# Altium PCB PCB1.PcbDoc
Units mil, origin at the board's own origin, x right, y up, seen from the top; angles counter-clockwise.
Board outline 2598.43 x 2755.91 mil, 2 copper layers (Top Layer, Bottom Layer); 54 components, 38 nets, 238 pads, 44 vias.
Unrouted connection lines stored in the file: 1.
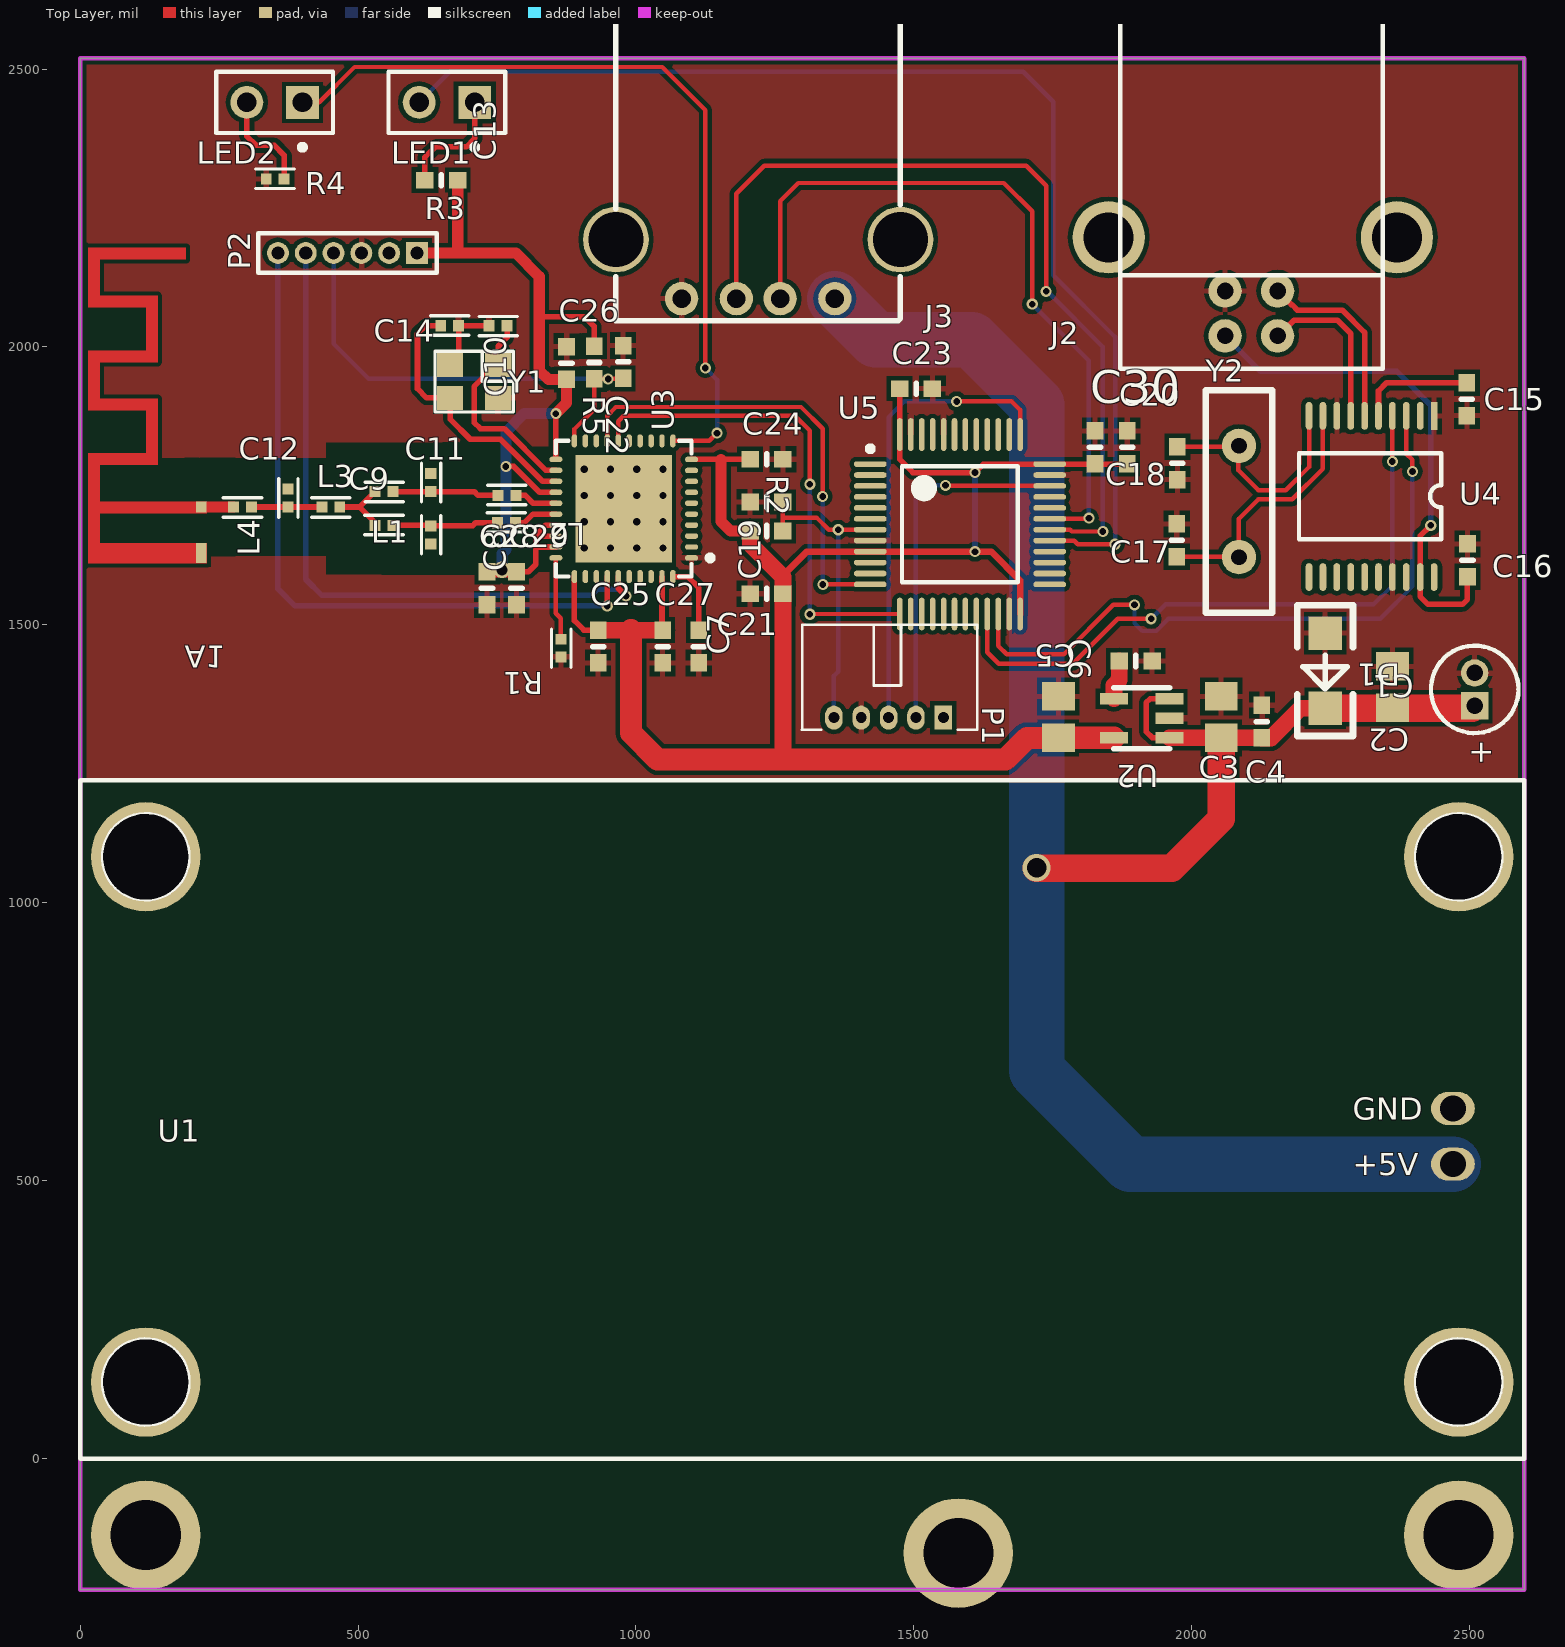
[diagram p0: Top Layer view]
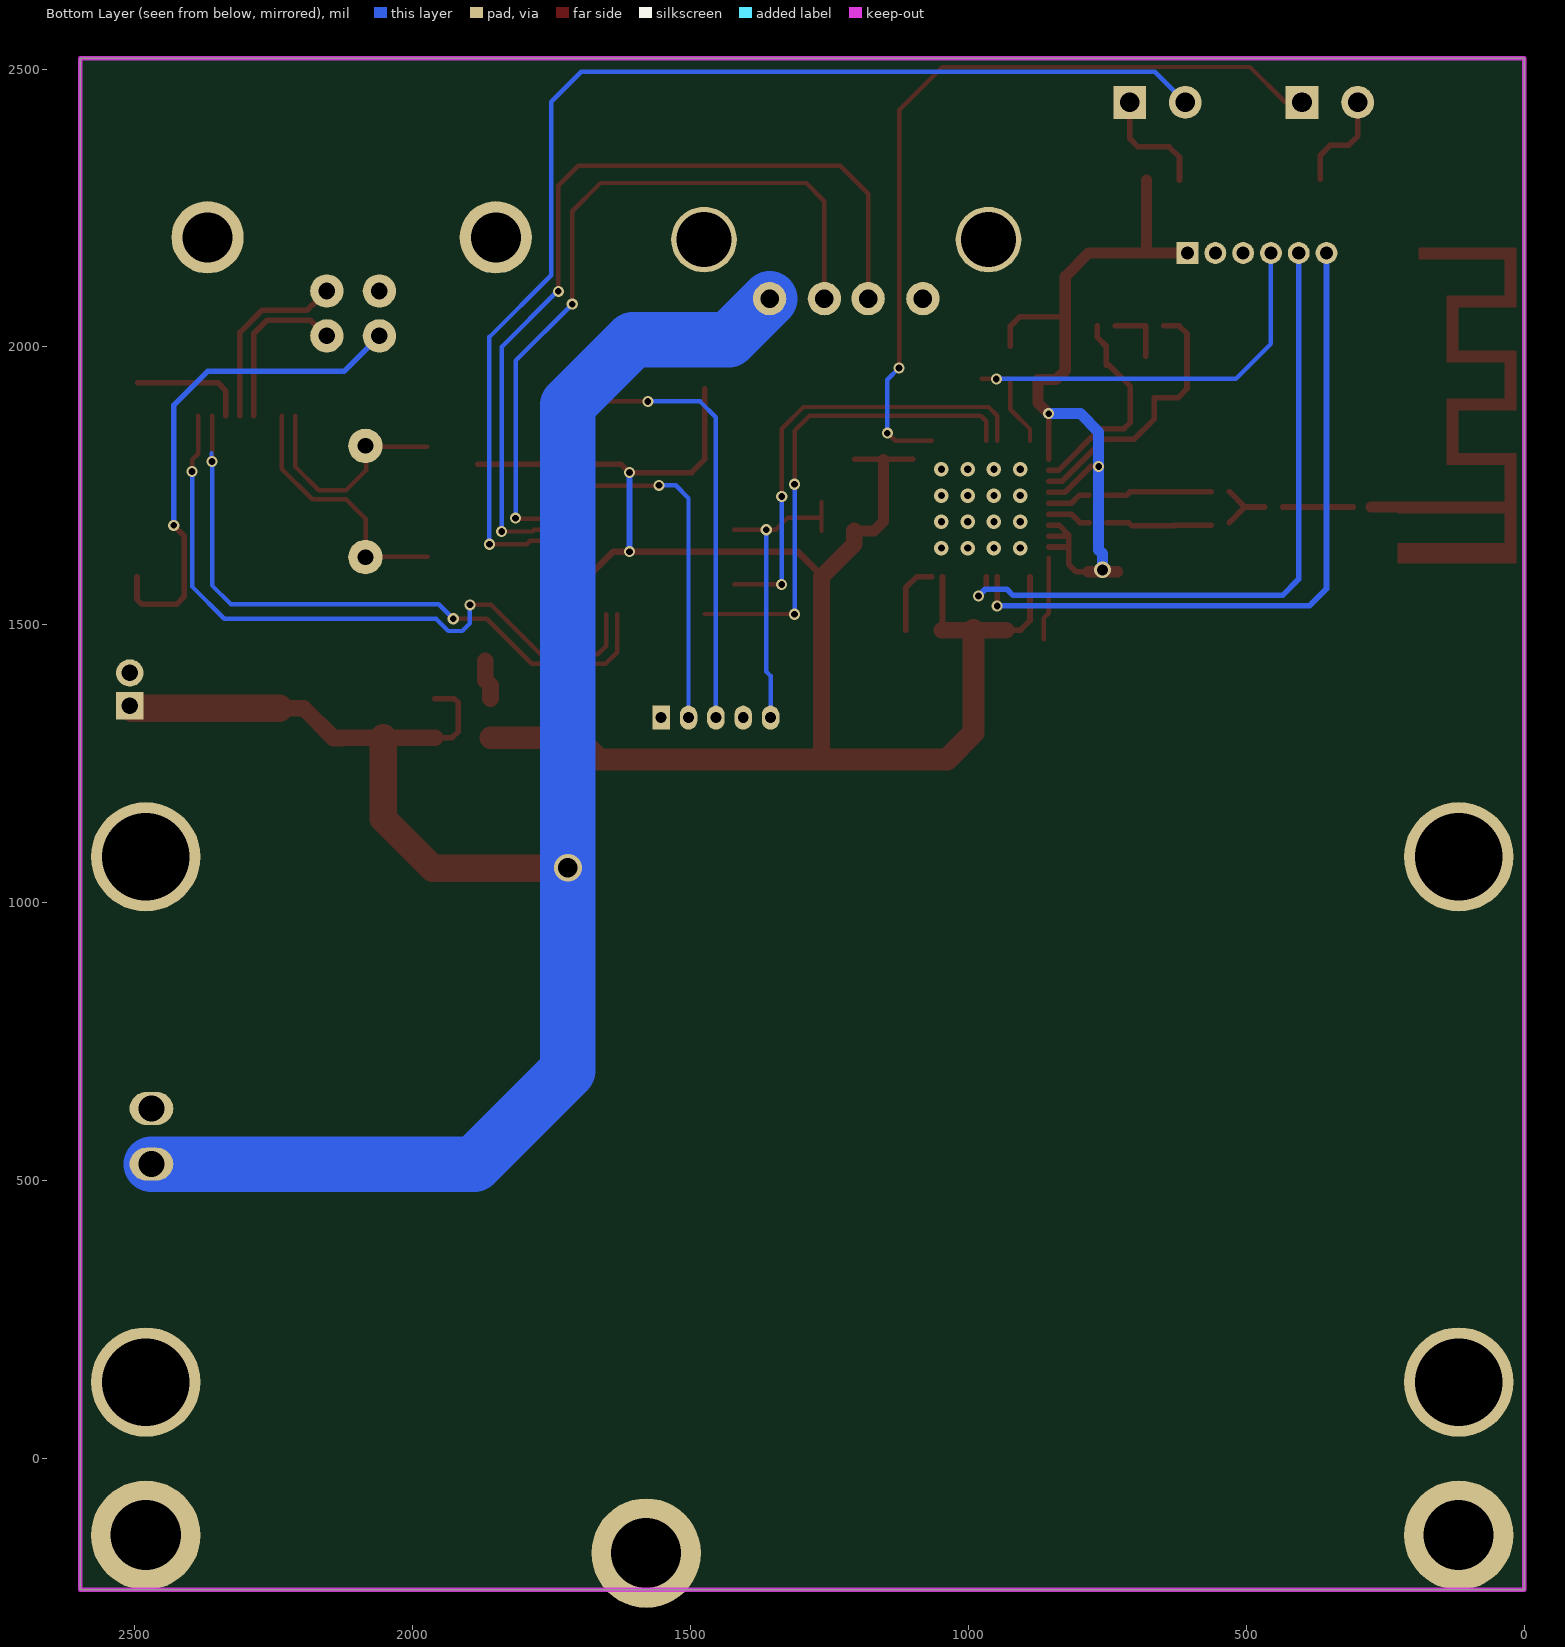
[diagram p1: Bottom Layer view, seen from below]

## Layer stack, top to bottom
Top Layer: signal copper 1.4
Dielectric: dielectric 12.6, FR-4, Dk 4.8
Bottom Layer: signal copper 1.4

## Board outline
0,-236.22 2598.43,-236.22 2598.43,2519.69 0,2519.69

## Design rules (kind name [scope] priority, off if disabled: settings)
Clearance rf [InNetClass('rf')] p1: gap=78.74
Clearance [All] p2: gap=8
FabricationTestPointUsage TestPointUsage [All] p1: valid=0 allowmultiple=FALSE
FabricationTestpoint Testpoint [All] p1: side=3 testpointundercomponent=TRUE minsize=40 maxsize=100 preferedsize=60 minholesize=0 maxholesize=40 preferedholesize=32 testpointgrid=1 allowsidetop=TRUE allowsidebottom=TRUE usegrid=TRUE gridtolerance=0.01
HoleSize [All] p1: absolutevalues=TRUE maxlimit=196.85 minlimit=11.81 maxpercent=80.000 minpercent=20.000
PolygonConnect [All] p1: connectstyle=Relief reliefconductorwidth=10 reliefentries=4 polygonreliefangle="90 Angle"
RoutingVias [All] p1: holewidth=28 width=50 viastyle="Through Hole" minholewidth=28 minwidth=50 maxholewidth=28 maxwidth=50
SilkscreenOverComponentPads [All] p1: minsilkscreentomaskgap=10
SolderMaskExpansion [All] p1: expansion=4
Width [All] p1: maxlimit=100 minlimit=8 preferedwidth=10
24 further rules are at their usual default settings.

## Classes and differential pairs
net class rf: NetA1_1 NetC8_1 NetC8_2 NetC9_1 NetC10_1 NetC10_2 NetC12_2

## Components (designator, comment, footprint, x,y, rotation, side; value= is the part's Value field where it differs from the comment)
A1 "Antenna" ANT-PCB-2.4G-IFA-AN043-TI-ORIGIN 218,1712 r270 top
C1 "47uF/35V" A 2509,1384 r90 top
C2 "1uF/50V" 0805 2361,1388 r90 top
C3 "10uF" 0805 2053,1334 r90 top
C4 "0.1uF" 0603 2126,1326 r90 top
C5 "10uF" 0805 1760,1334 r90 top
C6 "0.1uF" 0603 1899,1435 r0 top
C7 "1uF" 0603 1113,1461 r90 top
C8 "18pF" 0402_SMALL 756.13,1671.85 r0 top
C9 "1pF" 0402_SMALL 536,1666.85 r0 top
C10 "18pF" 0402_SMALL 757,1720.85 r0 top
C11 "1pF" 0402_SMALL 619,1767 r270 top
C12 "1pF" 0402_SMALL 362,1739 r270 top
C13 "12pF" 0402_SMALL 763,2050 r180 top
C14 "12pF" 0402_SMALL 654,2026 r0 top
C15 "0.1uF" 0603 2495,1906 r90 top
C16 "0.1uF" 0603 2496,1616 r90 top
C17 "22pF" 0603 1973,1652 r270 top
C18 "22pF" 0603 1974,1791 r90 top
C19 "0.1uF" 0603 1235,1721 r180 top
C20 "0.1uF" 0603 1884,1819.46 r270 top
C21 "0.1uF" 0603 1235,1556 r0 top
C22 "0.1uF" 0603 977,1973 r90 top
C23 "0.1uF" 0603 1504,1925 r180 top
C24 "1uF" 0603 1235,1798 r180 top
C25 "0.1uF" 0603 932,1461 r90 top
C26 "0.1uF" 0603 875,1971 r270 top
C27 "0.1uF" 0603 1048,1461 r90 top
C28 "0.1uF" 0603 732,1566 r90 top
C29 "0.1uF" 0603 785,1566 r90 top
C30 "1uF" 0603 1826,1819.46 r270 top
D1 "SMBJ7.0A" SMD4148 2240,1485 r270 top
J2 "USB-TYPE-B" USB_TYPEB 2060,2020 r90 top locked
J3 "检测板接口" USBA 1220,2140 r180 top locked
L1 "2nH" 0402_SMALL 558,1751.85 r180 top
L2 "2nH" 0402_SMALL 619,1673 r270 top
L3 "1nH" 0402_SMALL 462,1724 r180 top
L4 "3nH" 0402_SMALL 303,1724 r180 top
LED1 "红色led" PIN2 710,2440 r180 top
LED2 "蓝色" PIN2 400,2440 r180 top
P1 "Header 5" 5X1.25MMWS 1553,1333 r180 top
P2 "CC-debuger" MHDR1X6 606,2169 r180 top
R1 "56K/1%" 0402_SMALL 853,1469 r270 top
R2 "10K" 0603 1235,1669 r0 top
R3 "1K" 0603 650,2300 r180 top
R4 "1K" 0402_SMALL 340,2290 r0 top
R5 "10K" 0603 925,1972 r270 top
U1 "5V2A" ACDV5V 0,0 r0 top locked
U2 "RT9167A-33PB" SOT-23-5 1960,1297 r180 top
U3 "CC2541" QFN50P600X600X80-40N 978,1709 r180 top
U4 "CH345T" SSOP20 2436,1876 r180 top
U5 "STM32F103C8T6" LQFP48 1583,1681 r0 top
Y1 "8M" XTAL4TN_3225 709,1938 r180 top
Y2 "12M" XTAL1 2085,1622 r90 top

## Footprints (in the part's own frame and the unit in brackets; to place one, negate y for a bottom-side part, rotate by r counter-clockwise, add the part's x,y. Pads: shape width x height; smd on the part's side, far side on the other; paste and mask are expansions set on the pad)
5X1.25MMWS [mm]
  rect 0.8x1.1 hole 0.5: 1(0,0)
  oval 0.8x1.1 hole 0.5: 2(1.25,0) 3(2.5,0) 4(3.75,0) 5(5,0)
  silkscreen extent -1.55,-4.25 6.46,0.55
0402_SMALL [mm]
  rect 0.5x0.51 smd: 1(-0.13,0.305) 2(0.689,0.305)
  silkscreen extent -0.6,-0.12 1.15,0.77
0603 [mm]
  rect 0.8x0.762 smd: 1(0.75,0) 2(-0.75,0)
  silkscreen extent 0,-0.25 0,0.25
0805 [mm] "Chip Resistor; Body 2.0 x 1.3 mm (LxW typ)"
  rect 1.3x1.5 smd: 1(-0.95,0) 2(0.95,0)
A [mm] "Capacitor, Electrolytic, Radial; Body 4 x 5 mm (Dia.xH typ); Pin Spacing 1.5 mm (typ)"
  rect 1.25x1.25 hole 0.75: 1(-0.75,0)
  round 1.25 hole 0.75: 2(0.75,0)
  silkscreen extent -2,-2 2,2
ACDV5V [mm]
  oval 2x1.5 hole 1.2: 3(62.738,16) 4(62.738,13.46)
  silkscreen extent 0,0 66,31
ANT-PCB-2.4G-IFA-AN043-TI-ORIGIN [mm]
  rect 0.5x0.5 smd: 1(0,0)
  rect 0.9x0.5 smd: 2(2.1,0)
  Top Layer region: 2.575,-5.165 2.575,0.25 1.65,0.25 1.65,-4.64 0.276,-4.64 0.276,0.25 -0.25,0.25 -0.25,-4.64 -1.925,-4.64 -1.925,-2 -4.95,-2 -4.95,-4.64 -6.624,-4.64 -6.624,-2 -9.65,-2 -9.65,-2 -9.65,-2 -9.65,-4.64 -11.324,-4.64 -11.324,-4.64 -11.324,-4.64 -11.324,-4.64 -11.324,-0.7 -11.324,-0.7 -11.324,-0.7 -11.85,-0.7 -11.85,-0.715 -11.85,-0.716 -11.85,-0.716 -11.85,-5.163 -11.848,-5.165 -9.125,-5.165 -9.125,-2.525 -7.15,-2.525 -7.15,-5.165 -4.425,-5.165 -4.425,-2.525 -2.45,-2.525 -2.45,-5.165
LQFP48 [mm]
  oval 1.5x0.254 smd: 1(-4.1,2.75) 2(-4.1,2.25) 3(-4.1,1.75) 4(-4.1,1.25) 5(-4.1,0.75) 6(-4.1,0.25) 7(-4.1,-0.25) 8(-4.1,-0.75) 9(-4.1,-1.25) 10(-4.1,-1.75) 11(-4.1,-2.25) 12(-4.1,-2.75) 25(4.1,-2.75) 26(4.1,-2.25) 27(4.1,-1.75) 28(4.1,-1.25) 29(4.1,-0.75) 30(4.1,-0.25) 31(4.1,0.25) 32(4.1,0.75) 33(4.1,1.25) 34(4.1,1.75) 35(4.1,2.25) 36(4.1,2.75)
  oval 0.254x1.5 smd: 13(-2.75,-4.1) 14(-2.25,-4.1) 15(-1.75,-4.1) 16(-1.25,-4.1) 17(-0.75,-4.1) 18(-0.25,-4.1) 19(0.25,-4.1) 20(0.75,-4.1) 21(1.25,-4.1) 22(1.75,-4.1) 23(2.25,-4.1) 24(2.75,-4.1) 37(2.75,4.1) 38(2.25,4.1) 39(1.75,4.1) 40(1.25,4.1) 41(0.75,4.1) 42(0.25,4.1) 43(-0.25,4.1) 44(-0.75,4.1) 45(-1.25,4.1) 46(-1.75,4.1) 47(-2.25,4.1) 48(-2.75,4.1)
  silkscreen extent -4.22,-2.65 2.65,3.57
MHDR1X6 [mm] "Connector; Header; 6 Position"
  rect 1x1 hole 0.6: 1(0,0)
  round 1 hole 0.6: 2(1.27,0) 3(2.54,0) 4(3.81,0) 5(5.08,0) 6(6.35,0)
  silkscreen extent -0.9,-0.9 7.25,0.9
PIN2 [mm] "Photosensitive Diode; 2 Leads"
  rect 1.5x1.5 hole 0.9: 1(0,0)
  round 1.5 hole 0.9: 2(2.54,0)
  silkscreen extent -1.4,-1.4 3.94,2.17
QFN50P600X600X80-40N [mm] "QFN, 40-Leads, Body 6.2x6.2mm (max), Pitch 0.50mm, IPC Medium Density"
  oval 0.6x0.25 smd: 1(-3.1,2.25) 2(-3.1,1.75) 3(-3.1,1.25) 4(-3.1,0.75) 5(-3.1,0.25) 6(-3.1,-0.25) 7(-3.1,-0.75) 8(-3.1,-1.25) 9(-3.1,-1.75) 10(-3.1,-2.25) 21(3.1,-2.25) 22(3.1,-1.75) 23(3.1,-1.25) 24(3.1,-0.75) 25(3.1,-0.25) 26(3.1,0.25) 27(3.1,0.75) 28(3.1,1.25) 29(3.1,1.75) 30(3.1,2.25)
  oval 0.25x0.6 smd: 11(-2.25,-3.1) 12(-1.75,-3.1) 13(-1.25,-3.1) 14(-0.75,-3.1) 15(-0.25,-3.1) 16(0.25,-3.1) 17(0.75,-3.1) 18(1.25,-3.1) 19(1.75,-3.1) 20(2.25,-3.1) 31(2.25,3.1) 32(1.75,3.1) 33(1.25,3.1) 34(0.75,3.1) 35(0.25,3.1) 36(-0.25,3.1) 37(-0.75,3.1) 38(-1.25,3.1) 39(-1.75,3.1) 40(-2.25,3.1)
  rect 4.4x4.9 smd: 41(0,0)
  silkscreen extent -4.08,-3.1 3.1,3.1, body extent -3.08,-3.08 3.08,3.08, height 0.8
SMD4148 [mil]
  rect 60x60 smd: 1(0,0) 2(135,0)
  silkscreen extent -50,-50 185,50
SOT-23-5 [mil]
  rect 50x20 smd: 1(0,0) 2(0,-35) 3(0,-70) 4(100,-70) 5(100,0)
  silkscreen extent 0,-90 100,20
SSOP20 [mil]
  rect 12x50 smd: 1(0,0)
  oval 12x50 smd: 2(25,0) 3(50,0) 4(75,0) 5(100,0) 6(125,0) 7(150,0) 8(175,0) 9(200,0) 10(225,0) 11(225,290) 12(200,290) 13(175,290) 14(150,290) 15(125,290) 16(100,290) 17(75,290) 18(50,290) 19(25,290) 20(0,290)
  silkscreen extent -13,67 243,222
USB_TYPEB [mil]
  round 60 hole 30: 1(0,0) 2(0,-94.49) 3(80.71,-94.49) 4(80.71,0)
  round 130 hole 90: 5(177.16,209.45) 6(177.16,-309.05)
  silkscreen extent -59,-283 591,189
USBA [mm]
  round 1.524 hole 0.85: 1(-3.5,1.35) 2(-1,1.35) 3(1,1.35) 4(3.5,1.35)
  round 3 hole 2.5: ""(-6.5,-1.35) ""(6.5,-1.35)
  silkscreen extent -6.5,-12.15 6.5,2.35
XTAL1 [mil]
  round 62 hole 28: 1(0,0) 2(200,0)
  silkscreen extent -100,-60 300,60
XTAL4TN_3225 [mm]
  rect 1.2x1.1 smd: 1(-1.1,-0.75) 2(1.1,-0.75) 3(1.1,0.75) 4(-1.1,0.75)
  silkscreen extent -1.8,-1.38 1.79,1.4

## Part data
A1: "Generic Antenna"
C1: library part "Cap Pol1", "Polarized Capacitor (Radial)"
C2 C3 C4 C5 C6 C7 C8 C9 C10 C11 C12 C13 C14 C15 C16 C17 C18 C19 C20 C21 C22 C23 C24 C25 C26 C27 C28 C29 C30: library part Cap, "Capacitor"
D1: library part "D Zener", "Zener Diode"
J2 J3: library part "Header 4", "Header, 4-Pin"
L1 L2 L3 L4: library part Inductor, "Inductor"
LED1 LED2: library part LED0, "Typical INFRARED GaAs LED"
P1: "Header, 5-Pin"
P2: library part "Header 6", "Header, 6-Pin"
R1 R2 R3 R4 R5: library part "Res Semi", "Semiconductor Resistor"
Y1: library part CRYSTAL-4
Y2: library part XTAL, "Crystal Oscillator"

## Free pads (board coordinates)
  round 196.85 hole 125.98: 0(118.11,-137.8) 1(1580,-170) 1(2480.31,-137.8)
  round 196.85 hole 157.48: 2(118.11,137.8) 2(118.11,1082.68) 2(2480.31,137.8) 2(2480.31,1082.68)

## Via types
v1: diameter 20, hole 12, Top Layer to Bottom Layer, tented both sides, 26 vias
v2: diameter 25.98, hole 12.99, Top Layer to Bottom Layer, 16 vias
v3: diameter 30, hole 20, Top Layer to Bottom Layer, tented both sides, 1 vias
v4: diameter 50, hole 35, Top Layer to Bottom Layer, tented both sides, 1 vias

## Nets (pads, with @x,y where several pads share a name; then routed paths per layer and width w, separated by ;. In a path a pad name is that pad's centre, name@x,y a point inside that pad or via, vN(x,y) a via of type N, cw(c..) or ccw(c..) an arc to the next point about the centre after c; other vN are vias at no path point)
+3.3V: C5.1 C20.1 C21.1 C23.1 C24.1 C25.1 C26.1 C27.1 C28.1 C29.1 C30.1 P2.1 R2.2 R3.2 R5.2 U2.5 U3.10 U3.21 U3.24 U3.27 U3.28 U3.29 U3.31 U3.39 U5.9 U5.24 U5.36 U5.48 | length 4992.2
  Top Layer w10: v1(766,1785) 780.13,1785 826.6,1738.53 U3.24 ; C29.1 806.53,1595.53 820,1609 820,1662 837.47,1679.47 U3.27 ; 820.1,1640.1 U3.29 840.31,1640.1 ; 820.62,1659.79 U3.28 ; 826,2054 908,2054 925,2037 R5.2 ; U3.21 v1(855.95,1879.95) ; U3.31 889.42,1507.58 906.47,1490.53 C25.1 ; C27.1@1046.9,1491.63 U3.39 ; U3.10 1153,1797.58 C24.1@1205.06,1797.58 ; C23.1@1474.73,1924.74 U5.48 1474.73,1797.6 1498.33,1774 v1(1610,1774) 1625.27,1789.27 U5.36 C20.1@1883.33,1789.27
  Top Layer w12: 1267.47,1586.47 1264.53,1586.47 1264.53,1588.53 1307.79,1631.79 U5.9 v1(1610,1631.79) 1639.21,1631.79 1691.27,1579.73 U5.24
  Top Layer w20: P2.1 784,2169 826,2127 826,2054 826,1958 842.53,1941.47 C26.1 875,1899 v1(855.95,1879.95) ; 679.53,2169.53 R3.2 ; C28.1 C29.1 ; 1153,1797.58 1153,1686 1170,1669 R2.2
  Top Layer w30: C25.1 991,1490.53 C27.1 ; R2.2 1205.47,1645.53 1264.53,1586.47 C21.1 1264.53,1258.47
  Top Layer w40: 991,1490.53 991,1306 1039,1258 1665,1258 1703.6,1296.6 C5.1 ; C5.1@1760.4,1297 U2.5
  Bottom Layer w10: v1(1610,1631.79) v1(1610,1774)
  Bottom Layer w20: v3(759,1599) 759,1628 766,1635 v1(766,1785) 766,1847 798.95,1879.95 v1(855.95,1879.95)
+5V: C1.1 C2.1 C3.1 C4.2 D1.2 J3.1 U1.4 U2.1 U2.3 | length 3683.2
  Top Layer w10: U2.1 1929,1297 1918,1308 1918,1360 1925,1367 U2.3
  Top Layer w30: U2.1 C4.2@2125.47,1297 ; C4.2 2142.47,1296.47 2196,1350 D1.2
  Top Layer w50: v4@1720.8,1062 1964,1062 2053,1151 C3.1 ; D1.2 C1.1@2504.53,1350
  Bottom Layer w100: J3.1 1431.64,2013 1604,2013 1720.8,1896.2 v4(1720.8,1063) 1720.8,698.2 1889.08,529.92 U1.4
CCRST: C22.2 P2.4 R5.1 U3.20 | length 886.5
  Top Layer w8: U3.20 889.42,1852.42 925,1888 R5.1 C22.2@976,1942.47
  Bottom Layer w8: P2.4 456,2006 519.53,1942.47 898,1942.47 ; 925,1942.47 898,1942.47 ; v1@949,1942.47 898,1942.47
  other v1: 950,1942.47
GND: A1.2 C1.2 C2.2 C3.2 C4.1 C5.2 C6.1 C7.2 C11.1 C12.1 C13.2 C14.2 C15.2 C16.1 C17.2 C18.2 C19.1 C20.2 C21.2 C22.1 C23.2 C24.2 C25.2 C26.2 C27.2 C28.2 C29.2 C30.2 D1.1 J2.4 J3.4 L2.2 P1.4 P2.3 R1.2 R4.1 U1.3 U2.2 U3.1 U4.1 U4.8 U4.17 U5.8 U5.23 U5.35 U5.44 U5.47 Y1.2 Y1.4 | length 109.8
  Top Layer w10: Y1.2@681.13,1982.96 C14.2 C13.2
  other v2: 907.13,1638.13 954.38,1638.13 1001.62,1638.13 1048.87,1638.13 907.13,1685.38 954.38,1685.38 1001.62,1685.38 1048.87,1685.38 907.13,1732.62 954.38,1732.62 1001.62,1732.62 1048.87,1732.62 907.13,1779.87 954.38,1779.87 1001.62,1779.87 1048.87,1779.87
NetA1_1: A1.1 L4.2 | length 57.9
  Top Layer w20: A1.1 L4.2
NetC6_2: C6.2 U2.4 | length 71.9
  Top Layer w30: U2.4 1860,1391 1869.47,1400.47 C6.2
NetC7_1: C7.1 U3.40 | length 131.2
  Top Layer w10: U3.40 1093.05,1586.95 1113,1567 C7.1
NetC8_1: C8.1 C9.2 L2.1 | length 189.5
  Top Layer w10: C9.2 L2.1@630.27,1678.85 ; L2.1 706.14,1678.13 711.87,1683.85 C8.1
NetC8_2: C8.2 U3.26 | length 79
  Top Layer w10: C8.2 799.85,1683.85 815.16,1699.16 U3.26
NetC9_1: C9.1 L1.2 L3.1 | length 114.7
  Top Layer w10: L3.1 503.02,1712 ; C9.1@530.87,1684.15 503.02,1712 ; L1.2 503.02,1712
NetC10_1: C10.1 C11.2 L1.1 | length 191.7
  Top Layer w10: L1.1 C11.2 709.13,1739.87 716.15,1732.85 C10.1
NetC10_2: C10.2 U3.25 | length 77.6
  Top Layer w10: C10.2 801.15,1732.85 815.16,1718.84 U3.25
NetC12_2: C12.2 L3.2 L4.1 | length 126.7
  Top Layer w10: L4.1 L3.2
NetC13_1: C13.1 U3.22 Y1.1 | length 383.8
  Top Layer w10: C13.1 768.13,2017.13 752.31,2001.31 Y1.1 747.7,1967.53 709,1928.83 709,1864 720,1853 763.04,1853 838.14,1777.9 U3.22
NetC14_1: C14.1 U3.23 Y1.3 | length 487.1
  Top Layer w10: C14.1 621,2038 607,2024 607,1925 623.53,1908.47 Y1.3 665.69,1870.31 702,1834 756.59,1834 832.37,1758.21 U3.23
NetC15_1: C15.1 U4.5 | length 210
  Top Layer w10: U4.5 2336,1921 2350.53,1935.53 C15.1
NetC16_2: C16.2 J2.1 U4.19 | length 908.6
  Top Layer w10: v1(2430,1679) 2411,1660 U4.19 2411,1551 2425,1537 2487,1537 2496,1546 C16.2
  Bottom Layer w10: J2.1 2124,1956 2369,1956 2430,1895 v1(2430,1679)
NetC17_1: C17.1 U4.9 Y2.1 | length 463.5
  Top Layer w8: C17.1 2084.53,1622.47 2084.53,1690.53 2120,1726 2181,1726 2236,1781 U4.9
NetC18_1: C18.1 U4.10 Y2.2 | length 403.6
  Top Layer w8: C18.1 2083.53,1820.53 2083.53,1778.47 2120,1742 2169,1742 2211,1784 U4.10
NetJ2_2: J2.2 U4.7 | length 301.1
  Top Layer w8: J2.2 J2.2@2156,2020
  Top Layer w10: J2.2@2156,2020 2184,2048 2262,2048 2286,2024 U4.7
NetJ2_3: J2.3 U4.6 | length 337.5
  Top Layer w10: J2.3 2179.1,2076.1 2180.1,2076.1 2190.2,2066 2271,2066 2311,2026 U4.6
NetLED1_1: LED1.1 R3.1 | length 209.9
  Top Layer w10: R3.1 620.47,2341.47 639,2360 695,2360 710,2375 LED1.1
NetLED1_2: LED1.2 U5.29 | length 2148.4
  Top Layer w8: U5.29 1788.53,1651.47 1795,1645 v1(1862,1645)
  Bottom Layer w8: LED1.2 665,2495 1697,2495 1751,2441 1751,2129 1862,2018 v1(1862,1645)
NetLED2_1: LED2.1 U3.11 | length 1458.5
  Top Layer w8: LED2.1 430.12,2440 493.8,2503.69 1047.31,2503.69 1125,2426 v1(1125,1962) ; U3.11 1132.05,1831.05 v1(1146,1845)
  Bottom Layer w8: v1(1125,1962) 1146,1941 v1(1146,1845)
NetLED2_2: LED2.2 R4.2 | length 185.1
  Top Layer w10: LED2.2 300,2379 316,2363 349,2363 367.13,2344.87 R4.2
NetR1_1: R1.1 U3.30 | length 150
  Top Layer w8: U3.30 855.95,1521.05 865,1512 R1.1
NRST: C19.2 P1.5 R2.1 U5.7 | length 559.5
  Top Layer w8: R2.1 1264.53,1693 ; C19.2 1264.53,1693 ; U5.7 1346.84,1671.16 1325,1693 1264.53,1693
  Bottom Layer w8: P1.5 1356.15,1408.15 1364,1416 v1(1364,1671.16)
P21: P2.5 U3.35 | length 1225.3
  Top Layer w10: U3.35 968.16,1565.84 v1(982,1552)
  Bottom Layer w10: P2.5 406,1582 435,1553 920,1553 931.04,1564.04 969.96,1564.04 v1(982,1552)
P22: P2.6 U3.34 | length 1262.3
  Top Layer w10: v1(948.47,1534) 948.47,1575.53 U3.34
  Bottom Layer w10: P2.6 356,1565 387,1534 v1(948.47,1534)
RX1: J3.2 U5.31 | length 1341.3
  Top Layer w8: J3.2 1259.37,2262.37 1292,2295 1662,2295 1713,2244 v1(1713,2077) ; U5.31 1779,1690.84 ; 1792.84,1690.84 1779,1690.84 ; v1@1813.84,1690.84 1779,1690.84
  Bottom Layer w8: v1(1713,2077) 1815,1975 v1(1815,1692)
RX2: U3.16 U5.13 | length 905.4
  Top Layer w8: U3.16 968.16,1866.16 978,1876 1236,1876 ; 1255,1876 1236,1876 ; v1(1313,1753) 1313,1849 1286,1876 1236,1876 ; v1@1313.58,1519.58 U5.13
  Bottom Layer w8: v1(1313,1519) v1(1313,1753)
RX3: U4.3 U5.22 | length 1229.2
  Top Layer w8: U5.22 1651.9,1462.1 1667,1447 1770,1447 1859,1536 v1(1897,1536) ; U4.3 2386,1808 2397,1797 v1(2397,1776)
  Bottom Layer w8: v1(1897,1536) 1897,1503 1911,1489 1936.11,1489 1958.06,1510.94 2338.94,1510.94 2397,1569 v1(2397,1776)
SWCLK: P1.3 U5.37 | length 839.7
  Top Layer w8: v1(1577,1902) 1676,1902 1691.27,1886.73 U5.37
  Bottom Layer w8: P1.3 1454.57,1873.57 1483,1902 v1(1577,1902)
SWIO: P1.2 U5.34 | length 651.8
  Top Layer w8: v1@1558.1,1749.9 1598,1749.9 ; 1590.1,1749.9 1598,1749.9 ; U5.34 1598,1749.9
  Bottom Layer w8: P1.2 1503.79,1727.79 1527,1751 v1(1557,1751)
TX1: J3.3 U5.30 | length 1546.7
  Top Layer w8: J3.3 1180.63,2275.63 1231,2326 1702,2326 1738,2290 v1(1738,2100) ; U5.30 1781.16,1671.16 1784.32,1668 v1(1840,1668) v1@1843,1668
  Bottom Layer w8: v1@1739,2101 1840,2000 v1(1840,1668)
TX2: U3.17 U5.12 | length 847.9
  Top Layer w8: U3.17 948.47,1876.47 964,1892 1222,1892 ; 1249,1892 1222,1892 ; v1(1336,1731) 1336,1853 1297,1892 1222,1892 ; v1(1336.27,1572.73) U5.12
  Bottom Layer w8: v1@1336,1573 v1(1336,1731)
TX3: U4.4 U5.21 | length 1185.4
  Top Layer w8: U5.21 1632.21,1450.79 1653,1430 1786,1430 1867,1511 v1(1927,1511) v1@1928,1511 ; v1(2361,1794) U4.4
  Bottom Layer w8: v1(1927,1511) 1953,1537 2285,1537 2327,1537 2361,1571 v1(2361,1794) ; v1@2362,1794 2362,1808.76
VCC_3.3V: P1.1
pads on no net: J2.5 J2.6 J3. P2.2 U3.2 U3.3 U3.4 U3.5 U3.6 U3.7 U3.8 U3.9 U3.12 U3.13 U3.14 U3.15 U3.18 U3.19 U3.32 U3.33 U3.36 U3.37 U3.38 U3.41 U4.2 U4.11 U4.12 U4.13 U4.14 U4.15 U4.16 U4.18 U4.20 U5.1 U5.2 U5.3 U5.4 U5.5 U5.6 U5.10 U5.11 U5.14 U5.15 U5.16 U5.17 U5.18 U5.19 U5.20 U5.25 U5.26 U5.27 U5.28 U5.32 U5.33 U5.38 U5.39 U5.40 U5.41 U5.42 U5.43 U5.45 U5.46

## Polygon pours and split planes (outlines as drawn)
GND on Bottom Layer "Top Layer-No Net" (solid, remove dead copper, pour order 1000): 3994,3186.26 6374,3186.26 6374,1196.26 5354,1196.26 5354,1886.26 3994,1886.26
GND on Top Layer "Top Layer-No Net" (solid, remove dead copper): 0,2519.69 10.68,2509 2598.43,2509 2598.43,1236.57 2607,1228 2598,1219 0,1219 0,2503 -13,2516

## Keep-outs
Keep-Out Layer:
  the board outline again, w8

## Text inside footprints (layer, text, board x,y; h text height)
C1: Top Overlay "+" at 2538.53,1247.19 h40 r90
U1: Top Overlay "+5V" at 2290,510 h40; Top Overlay "GND" at 2290,610 h40